# Altium PCB LTC_Test_Board.PcbDoc
Units mil, origin at the board's own origin, x right, y up, seen from the top; angles counter-clockwise.
Board outline 3935 x 3390 mil, 2 copper layers (Top Layer, Bottom Layer), stack 21 mil thick; 76 components, 66 nets, 270 pads, 43 vias.
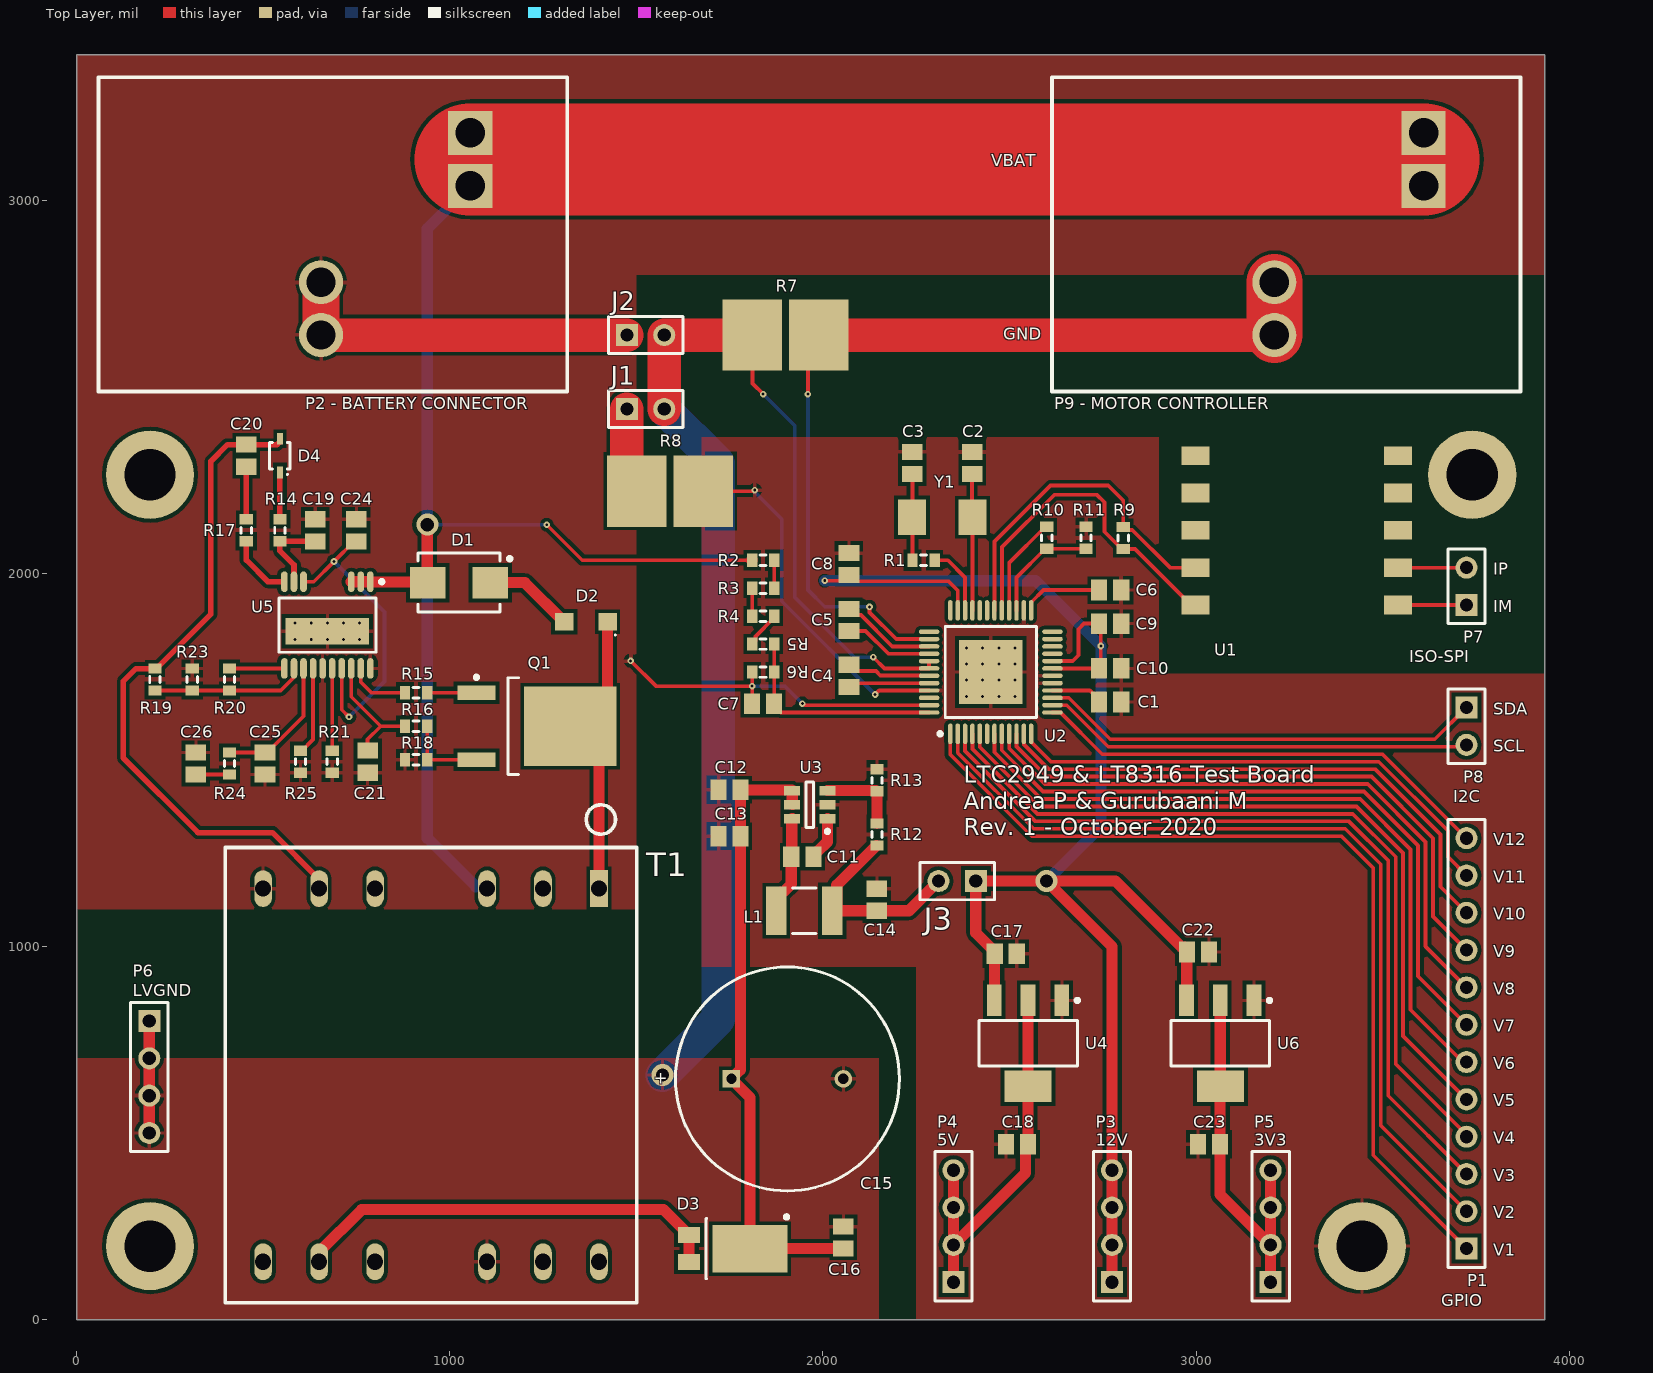
[diagram p0: Top Layer view]
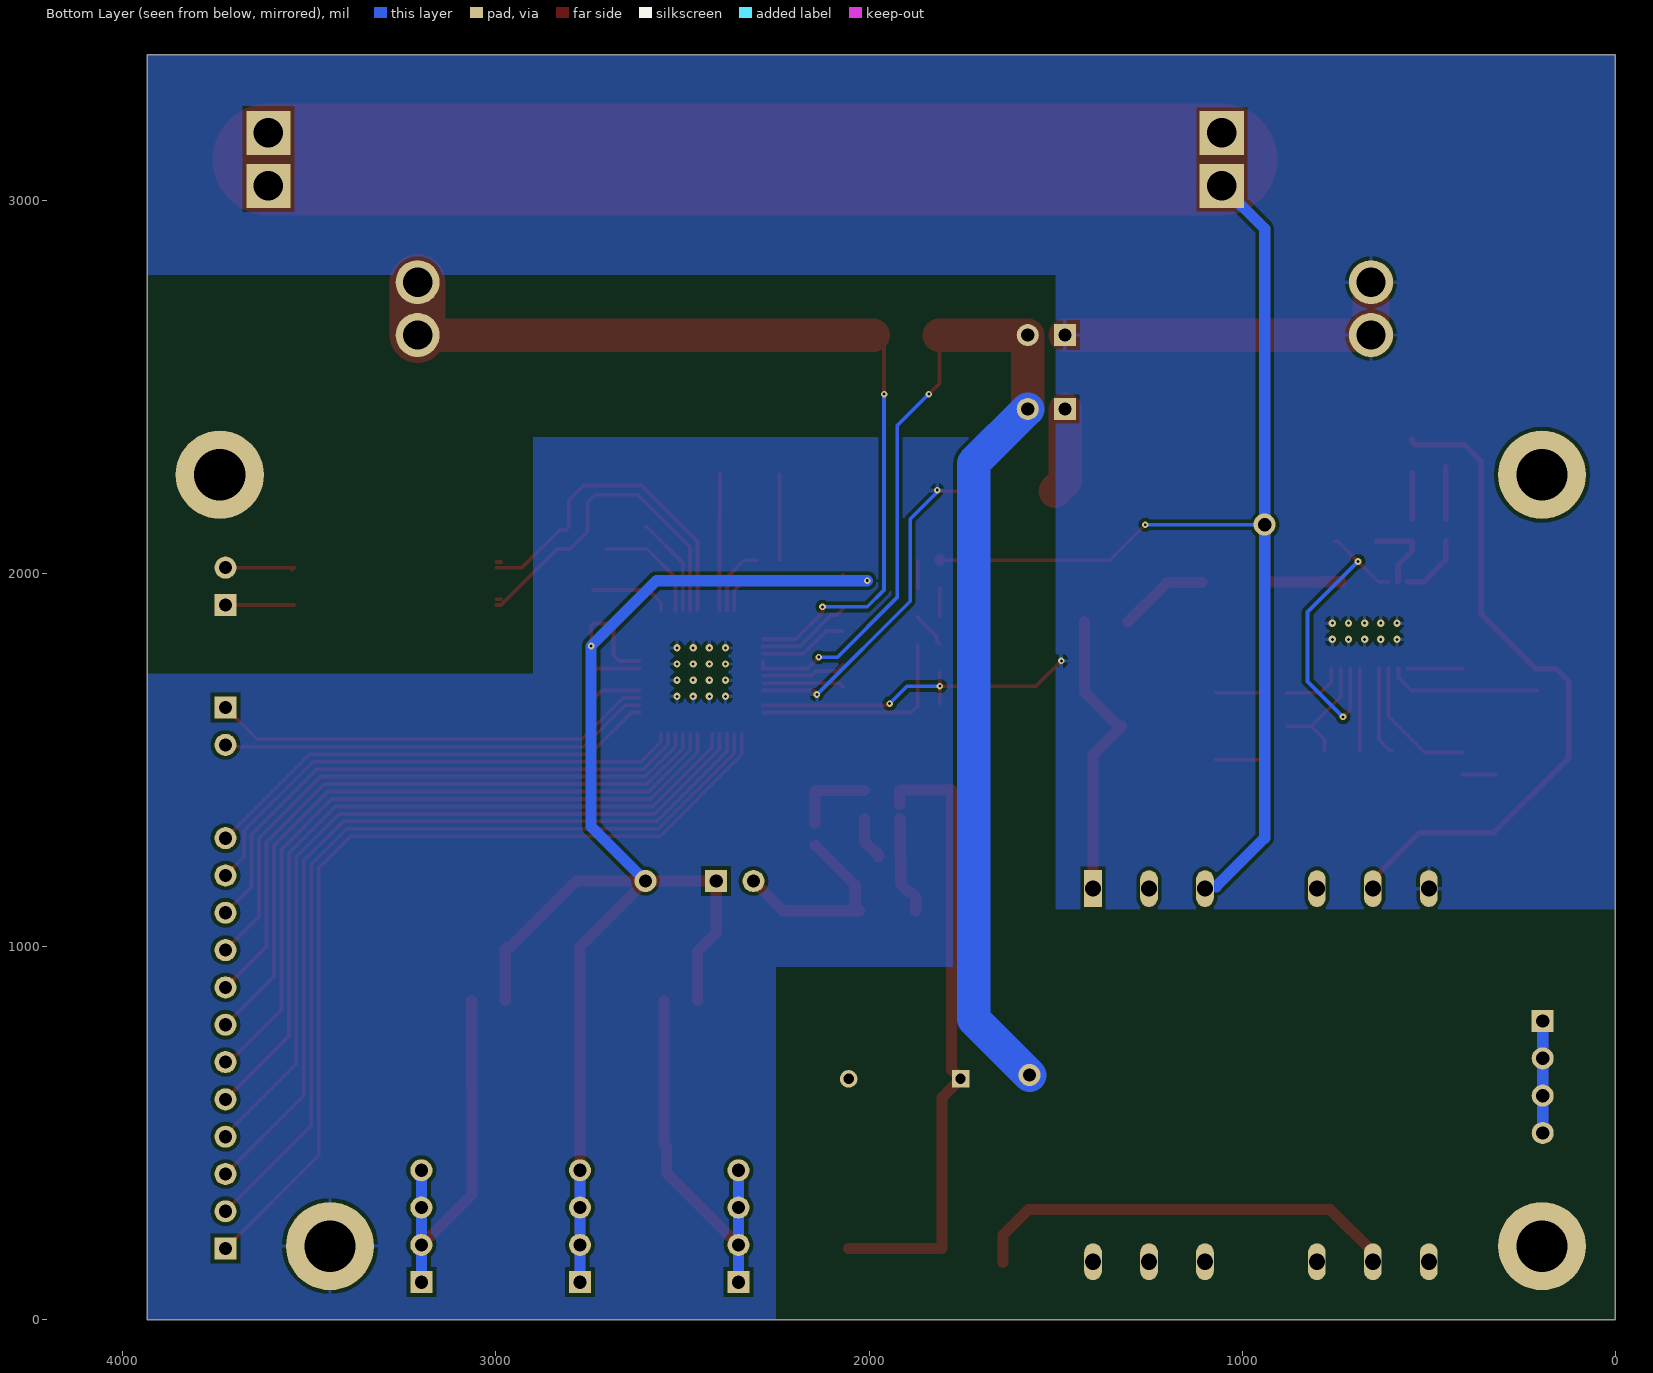
[diagram p1: Bottom Layer view, seen from below]

## Layer stack, top to bottom
Top Solder: solder mask 0.4, Solder Resist, Dk 3.5
Top Layer: signal copper 1.4
Dielectric 2: prepreg 2.8, PP-006, Dk 4.1
Dielectric 1: dielectric 12.6, FR-4, Dk 4.8
Dielectric 3: prepreg 2.8, PP-006, Dk 4.1
Bottom Layer: signal copper 1.4
Bottom Solder: solder mask 0.4, Solder Resist, Dk 3.5

## Board outline
0,0 3935,0 3935,3390 0,3390

## Design rules (kind name [scope] priority, off if disabled: settings)
Clearance [All] p1: gap=10 ignorepadtopadclearanceinfootprint=FALSE except(0: Arc-Hole Track-Hole SMDPad-Hole THPad-Hole Via-Hole Fill-Hole Poly-Hole Region-Hole Text-Hole; 5: Arc-Arc Arc-Track Track-Track SMDPad-SMDPad; 7.87: Arc-SMDPad Track-SMDPad)
HoleSize [All] p1: absolutevalues=TRUE maxlimit=248.03 minlimit=7.87 maxpercent=80.000 minpercent=20.000
HoleToHoleClearance [All] p1: gap=21.26 allowstackedmicrovias=TRUE
MinimumSolderMaskSliver [All] p1: minsoldermaskwidth=7.87
PolygonConnect [All] p1: connectstyle=Relief reliefconductorwidth=10 reliefentries=4 polygonreliefangle="90 Angle" airgapwidth=10
RoutingVias [All] p1: holewidth=7.87 width=17.72 viastyle="Through Hole" minholewidth=7.87 minwidth=17.72 maxholewidth=39.37 maxwidth=59.06
SilkToSilkClearance [All] p1: silktosilkclearance=5.91
SilkToSolderMaskClearance [IsText vs HasFootprint('No Footprint')] p1: minsilkscreentomaskgap=5.91 clearancetoexposedcopper=TRUE
SolderMaskExpansion [All] p1: expansion=3.94 istentingtop=FALSE
Width [All] p1: maxlimit=300 minlimit=10 preferedwidth=10 minimp=50.000000 maximp=50.000000 favimp=50.000000
25 further rules are at their usual default settings.

## Classes and differential pairs
net class V[1..12]: V1 V2 V3 V4 V5 V6 V7 V8 V9 V10 V11 V12
component class "Main IC": C1 C2 C3 C4 C5 C6 C7 C8 C9 C10 J1 R1 R2 R3 R4 R6 R7 R8 R9 R10 R11 U1 U2 Y1
component class Headers: P1 "P2 - BATTERY CONNECTOR" P3 P4 P5 P6 "P6 GND" P7 P8 "P9 - MOTOR CONTROLLER"
component class Designator: C11 C12 C13 C14 C15 C16 C17 C18 C19 C20 C21 C22 C23 C24 C25 C26 D1 D2 D3 D4 "J2 GND" J3 L1 Q1 R12 R13 R14 R15 R16 R17 R18 R19 R20 R21 R23 R24 R25 T1 U3 U4 U5 U6

## Components (designator, comment, footprint, x,y, rotation, side; value= is the part's Value field where it differs from the comment)
C1 "Cap" C0805 2770,1655 r0 top value=1uF
C2 "50V" C0805 2400,2295 r270 top value=4pF
C3 "50V" C0805 2240,2295 r270 top value=4pF
C4 "Cap" C0805 2070,1725 r90 top value=1uF
C5 "Cap" C0805 2070,1875 r90 top value=1uF
C6 "Cap" C0805 2770,1955 r0 top value=1uF
C7 "Cap" C0805 1840,1650 r0 top value=10nF
C8 "Cap" C0805 2070,2025 r90 top value=1uF
C9 "Cap" C0805 2770,1865 r0 top value=1uF
C10 "Cap" C0805 2770,1745 r0 top value=0.1uF
C11 "C_OUT" C0805 1945,1240 r0 top value=0.1uF
C12 "C_OUT" C0805 1750,1420 r0 top value=4.7uF
C13 "C_OUT" C0805 1750,1295 r0 top value=0.1uF
C14 "C_OUT" C0805 2145,1125 r270 top value=10uF
C15 "C_OUT" RB7.6-15 1905,645 r180 top value=100uF
C16 "C_OUT" C0805 2055,220 r270 top value=10uF
C17 "C_OUT" C0805 2490,980 r180 top value=10uF
C18 "C_OUT" C0805 2520,470 r0 top value=10uF
C19 "C_BIAS" C0805 640,2115 r270 top value=4.7uF
C20 "C_DCM" C0805 455,2315 r270 top value=47pF
C21 "C_OUT" C0805 780,1495 r90 top value=1nF
C22 "C_OUT" C0805 3005,985 r180 top value=10uF
C23 "C_OUT" C0805 3035,470 r0 top value=10uF
C24 "C_INTVCC" C0805 750,2115 r90 top value=4.7uF
C25 "C_ADD" C0805 505,1490 r90 top value=470pF
C26 "C_C" C0805 320,1490 r270 top value=220nF
D1 "Z_SNUB" "DO-214AA, SMB" 1025,1975 r0 top
D2 "D_SNUB" SOD-123FL 1365,1870 r180 top
D3 "D_OUT" "POWERDI5 (DPAK184P650X115-3N)" 1757.76,190 r0 top
D4 "D_BIAS" SOD323 545,2315 r270 top
J1 "Header 2" HDR1X2 1475,2440 r0 top
J2 "Header 2" HDR1X2 1475,2638.27 r0 top
J3 "Header 2" HDR1X2 2410,1175 r180 top
L1 "Inductor" INDC4532 1950,1095 r0 top value=33uH
P1 "Header 12" HDR1X12 3725,190 r90 top
"P2 - BATTERY CONNECTOR" "MOLEX-0399100102" PHOENIX-1017531 1055,3180 r270 top (schematic designator P2)
P3 "Header 1x4" HDR1X4 2775,100 r90 top
P4 "Header 1x4" HDR1X4 2350,100 r90 top
P5 "Header 1x4" HDR1X4 3200,100 r90 top
P6 "Header 1x4" HDR1X4 195,800 r270 top
P7 "Header 2" HDR1X2 3725,1915 r90 top
P8 "Header 2" HDR1X2 3725,1640 r270 top
"P9 - MOTOR CONTROLLER" "MOLEX-0399100102" PHOENIX-1017531 3610,3180 r270 top (schematic designator P9)
Q1 "MOSFET-N" "DPAK (228P972X240-3N)" 1235,1590 r0 top
R1 "0603" J1-0603 2270,2035 r180 top value=0
R2 "Res1" J1-0603 1840,2035 r180 top value=10K
R3 "Res1" J1-0603 1840,1960 r0 top value=10K
R4 "Res1" J1-0603 1840,1885 r180 top value=10K
R5 "Res1" J1-0603 1840,1810 r180 top value=10K
R6 "Res1" J1-0603 1840,1735 r0 top value=10K
R7 "Res1" 2818#1 1900,2638.27 r0 top value=100m
R8 "Res1" 2818#2 1590,2220 r0 top value=100m
R9 "1%" J1-0603 2805,2094.53 r90 top value=120
R10 "1%" J1-0603 2600,2095 r90 top value=3K
R11 "1%" J1-0603 2705,2095 r90 top value=1K
R12 "Res1" J1-0603 2145,1300 r90 top value=243k
R13 "Res1" J1-0603 2145,1445 r270 top value=22.1k
R14 "R_ADD" J1-0603 545,2115 r90 top value=10
R15 "R_SNS" J1-0603 910,1680 r0 top value=20
R16 "R_SNS" J1-0603 910,1590 r0 top value=100
R17 "R_DCM" J1-0603 455,2115 r90 top value=10k
R18 "R_SNS" J1-0603 910,1500 r180 top value=50m
R19 "R_FB2" J1-0603 210,1715 r90 top value=44.2k
R20 "R_TC" J1-0603 410,1715 r270 top value=259k
R21 "R_C" J1-0603 685,1495 r90 top value=0
R23 "R_FB1" J1-0603 310,1715 r270 top value=4.99k
R24 "R_C" J1-0603 410,1490 r90 top value=10k
R25 "R_IREG" J1-0603 600,1495 r90 top value=56.2k
T1 "8:2:1" PQ2620 1400,1155 r270 top
U1 "HM2100NLT" HM2100NLT 3270,2115 r90 top
U2 "LTC2949" LTC2949 2450,1735 r90 top
U3 "TPS560430" SOT23-6_N 1965,1380 r180 top
U4 "NCP1117LPST50" NCP1117LPST 2550,740 r270 top
U5 "LT8316-EFE" LTC8315/8316 672.2,1861.14 r270 top
U6 "NCP1117LPST33" NCP1117LPST 3065,740 r270 top
Y1 "CX5032GB" CX5032GB08000H0HPQZ1 2320,2150 r0 top

## Footprints (in the part's own frame and the unit in brackets; to place one, negate y for a bottom-side part, rotate by r counter-clockwise, add the part's x,y. Pads: shape width x height; smd on the part's side, far side on the other; paste and mask are expansions set on the pad)
2818#1 [mm] "Chip Resistor, 2-Leads, Body 7.11x4.57mm, IPC Medium Density"
  rect 4.05x4.85 smd: 1(-2.25,0) 2(2.25,0)
  body extent -3.69,-2.42 3.68,2.41, height 1.76
2818#2 [mm] "Chip Resistor, 2-Leads, Body 7.11x4.57mm, IPC Medium Density"
  rect 4.05x4.85 smd: 1(-2.25,0) 2(2.286,0)
  body extent -3.69,-2.42 3.68,2.41, height 1.76
C0805 [mm] "Chip Capacitor, Body 2.0x1.3mm, IPC High Density"
  rect 1.1x1.4 smd: 1(-0.75,0) 2(0.75,0)
  body extent -1.1,-0.72 1.1,0.72, height 1.4
CX5032GB08000H0HPQZ1 [mm]
  rect 1.9x2.4 smd: 1(-2.05,0) 2(2.05,0)
  body extent -2.5,-1.6 2.5,1.6, height 1.1
"DO-214AA, SMB" [mm] "Molded Diode, 2-Leads, Body 5.40x3.62mm, IPC Medium Density"
  rect 2.4x2.15 smd: 1(-2.125,0) 2(2.125,0)
  silkscreen extent -2.8,-2 3.58,2, body extent -2.8,-1.97 2.8,1.97, height 2.44
"DPAK (228P972X240-3N)" [mm] "D-PAK, 3-Pads, Body 6.20x6.66mm (max), IPC Medium Density"
  rect 2.6x1 smd: 1(-4.15,2.28) 3(-4.15,-2.28)
  rect 6.3x5.4 smd: 2(2.25,0)
  silkscreen extent -4.27,-3.3 -1.3,3.45, body extent -2,-3.3 4.2,3.3, height 2.4
HDR1X2 [mm] "Connector; Header; 2 Position"
  rect 1.5x1.5 hole 0.9: 1(0,0)
  round 1.5 hole 0.9: 2(2.54,0)
  silkscreen extent -1.27,-1.27 3.81,1.27
HDR1X4 [mm] "Connector; Header; 4 Position"
  rect 1.5x1.5 hole 0.9: 1(0,0)
  round 1.5 hole 0.9: 2(2.54,0) 3(5.08,0) 4(7.62,0)
  silkscreen extent -1.27,-1.27 8.89,1.27
HDR1X12 [mm] "Connector; Header; 12 Position"
  rect 1.5x1.5 hole 0.9: 1(0,0)
  round 1.5 hole 0.9: 2(2.54,0) 3(5.08,0) 4(7.62,0) 5(10.16,0) 6(12.7,0) 7(15.24,0) 8(17.78,0) 9(20.32,0) 10(22.86,0) 11(25.4,0) 12(27.94,0)
  silkscreen extent -1.27,-1.27 29.21,1.27
HM2100NLT [mm]
  rect 1.27x1.89 smd: 1(-5.08,-6.895) 2(-2.54,-6.895) 3(0,-6.895) 4(2.54,-6.895) 5(5.08,-6.895) 6(5.08,6.895) 7(2.54,6.895) 8(0,6.895) 9(-2.54,6.895) 10(-5.08,6.895)
  body extent -7.37,-5.84 7.37,5.84, height 3.45
INDC4532 [mm] "Chip Inductor, Body 4.5x3.2mm, IPC High Density"
  rect 1.4x3.3 smd: 1(-1.9,0) 2(1.9,0)
  silkscreen extent -0.8,-1.55 0.8,1.55, body extent -2.4,-1.7 2.4,1.7, height 0.55
J1-0603 [mm] "Chip Resistor, Body 1.6x0.8mm, IPC High Density"
  rect 0.7x0.9 smd: 1(-0.75,0) 2(0.75,0)
  silkscreen extent -0.2,-0.35 0.2,0.35, body extent -0.85,-0.48 0.85,0.48, height 0.9
LTC2949 [mm] "LQFP, 48-Leads, IPC Medium Density"
  oval 1.4x0.3 smd: 1(-4.2,2.75) 2(-4.2,2.25) 3(-4.2,1.75) 4(-4.2,1.25) 5(-4.2,0.75) 6(-4.2,0.25) 7(-4.2,-0.25) 8(-4.2,-0.75) 9(-4.2,-1.25) 10(-4.2,-1.75) 11(-4.2,-2.25) 12(-4.2,-2.75) 25(4.2,-2.75) 26(4.2,-2.25) 27(4.2,-1.75) 28(4.2,-1.25) 29(4.2,-0.75) 30(4.2,-0.25) 31(4.2,0.25) 32(4.2,0.75) 33(4.2,1.25) 34(4.2,1.75) 35(4.2,2.25) 36(4.2,2.75)
  oval 0.3x1.4 smd: 13(-2.75,-4.2) 14(-2.25,-4.2) 15(-1.75,-4.2) 16(-1.25,-4.2) 17(-0.75,-4.2) 18(-0.25,-4.2) 19(0.25,-4.2) 20(0.75,-4.2) 21(1.25,-4.2) 22(1.75,-4.2) 23(2.25,-4.2) 24(2.75,-4.2) 37(2.75,4.2) 38(2.25,4.2) 39(1.75,4.2) 40(1.25,4.2) 41(0.75,4.2) 42(0.25,4.2) 43(-0.25,4.2) 44(-0.75,4.2) 45(-1.25,4.2) 46(-1.75,4.2) 47(-2.25,4.2) 48(-2.75,4.2)
  rect 4.35x4.35 smd: 49(0,0)
  silkscreen extent -4.32,-3.1 3.1,3.57, body extent -3.5,-3.5 3.5,3.5, height 1.6
LTC8315/8316 [mm] "TSOP, 20-Leads, Body 6.50x4.40mm, Pitch 0.65mm, Thermal Pad 5.68x1.78mm, IPC Medium Density"
  oval 1.4x0.45 smd: 1(-2.95,2.925) 2(-2.95,2.275) 3(-2.95,1.625) 8(-2.95,-1.625) 9(-2.95,-2.275) 10(-2.95,-2.925) 11(2.95,-2.925) 12(2.95,-2.275) 13(2.95,-1.625) 14(2.95,-0.975) 15(2.95,-0.325) 16(2.95,0.325) 17(2.95,0.975) 18(2.95,1.625) 19(2.95,2.275) 20(2.95,2.925)
  rect 1.78x5.68 smd: PAD(0.42,0)
  silkscreen extent -3.07,-3.3 1.85,3.83, body extent -2.25,-3.3 2.25,3.3, height 1.2
NCP1117LPST [mm] "SOT223, 4-Leads, Body 6.50x7.00mm (avg), Pitch 2.30mm, IPC Medium Density"
  rect 2.15x1 smd: 1(-2.925,2.3) 2(-2.925,0) 3(-2.925,-2.3)
  rect 2.15x3.2 smd: 2(2.925,0)
  silkscreen extent -3.05,-3.35 1.55,3.48, body extent -1.85,-3.35 1.85,3.35, height 1.8
PHOENIX-1017531 [mm]
  rect 3x3 hole 2: 1(0,0) 1(3.6,0)
  round 3 hole 2: 1(3.6,0) 2(10.16,-10.16) 2(13.76,-10.16)
  silkscreen extent -3.79,-25.3 17.6,6.6
"POWERDI5 (DPAK184P650X115-3N)" [mm] "TO, 3-Pads, Body 5.83x5.39mm (max), IPC Medium Density"
  rect 1.5x1.1 smd: 1(-2.95,-0.92) 1(-2.95,0.92)
  rect 5.1x3.25 smd: 2(1.2,0)
  silkscreen extent -1.8,-2.05 3.81,2.28, body extent -2.65,-2.02 2.8,2.02, height 1.15
PQ2620 [mm] "SUMIDA 11328-T080"
  rect 2.5x1.2 hole 1.1: 1(0,0)
  oval 2.5x1.2 hole 1.1: 2(0,-3.81) 3(0,-7.62) 4(0,-15.24) 5(0,-19.05) 6(0,-22.86) 7(25.4,-22.86) 8(25.4,-19.05) 9(25.4,-15.24) 10(25.4,-7.62) 11(25.4,-3.81) 12(25.4,0)
  silkscreen extent -5.7,-25.43 28.2,2.57
RB7.6-15 [mm] "Polarized Capacitor (Radial); 2 Leads"
  rect 1.2x1.2 hole 0.7: 1(3.81,0)
  round 1.2 hole 0.7: 2(-3.81,0)
  silkscreen extent -7.62,-7.62 7.62,7.62
SOD323 [mm] "SODFL, 2-Leads, Body 1.30x2.50mm, IPC Medium Density"
  rect 0.8x0.4 smd: 1(-1.15,0) 2(1.15,0)
  silkscreen extent -0.9,-0.7 1.32,0.7, body extent -0.9,-0.7 0.9,0.7, height 1.2
SOD-123FL [mm] "SOD-123FL, IPC Medium Density"
  rect 1.25x1.2 smd: 1(-1.475,0) 2(1.475,0)
  silkscreen extent -2.05,0.85 -1.95,0.95, body extent -1.45,-0.95 1.45,0.95, height 1.43
SOT23-6_N [mm] "SOT23, 6-Leads, Body 2.9x1.6mm, Pitch 0.95mm, Lead Span 2.7mm, IPC Medium Density"
  rect 1.1x0.65 smd: 1(-1.2,0.95) 2(-1.2,0) 3(-1.2,-0.95) 4(1.2,-0.95) 5(1.2,0) 6(1.2,0.95)
  silkscreen extent -1.33,-1.55 0.25,1.95, body extent -0.9,-1.55 0.9,1.55, height 1.45

## Part data
C1 C4 C5 C6 C7 C8 C9 C10: "Capacitor", LatestRevisionDate=17-Jul-2002, LatestRevisionNote="Re-released for DXP Platform.", PackageDescription="Radial Cap, Thru-Hole; 2 Leads; 0.3 in Pin Spacing", PackageReference=RAD-0.3, Published=8-Jun-2000, Publisher="Altium Limited"
C2: library part Cap, "CBR08C409B5GAC. 4pF ±0.1pF 50V Ceramic Capacitor C0G, NP0 0805 (2012 Metric)", LatestRevisionDate=17-Jul-2002, LatestRevisionNote="Re-released for DXP Platform.", PackageDescription="Radial Cap, Thru-Hole; 2 Leads; 0.3 in Pin Spacing", PackageReference=RAD-0.3, Published=8-Jun-2000, Publisher="Altium Limited"
C3: library part Cap, "CBR08C409B5GAC", LatestRevisionDate=17-Jul-2002, LatestRevisionNote="Re-released for DXP Platform.", PackageDescription="Radial Cap, Thru-Hole; 2 Leads; 0.3 in Pin Spacing", PackageReference=RAD-0.3, Published=8-Jun-2000, Publisher="Altium Limited"
C11 C12 C13 C14 C17 C18 C19 C20 C21 C22 C23 C24 C25 C26: library part Cap, "Capacitor", LatestRevisionDate=17-Jul-2002, LatestRevisionNote="Re-released for DXP Platform.", PackageDescription="Radial Cap, Thru-Hole; 2 Leads; 0.3 in Pin Spacing", PackageReference=RAD-0.3, Published=8-Jun-2000, Publisher="Altium Limited"
C15: library part "Cap Pol1", "Polarized Capacitor (Radial)", Voltage=35V, LatestRevisionDate=17-Jul-2002, LatestRevisionNote="Re-released for DXP Platform.", PackageDescription="Polarized Capacitor (Radial); 2 Leads", PackageReference=RB7.6-15, Published=8-Jun-2000, Publisher="Altium Limited"
C16: library part Cap, "Capacitor", Voltage=50V, LatestRevisionDate=17-Jul-2002, LatestRevisionNote="Re-released for DXP Platform.", PackageDescription="Radial Cap, Thru-Hole; 2 Leads; 0.3 in Pin Spacing", PackageReference=RAD-0.3, Published=8-Jun-2000, Publisher="Altium Limited"
D1: library part "D Zener", "Zener Diode", PartNumber=SMBJ188A, Reverse Voltage=328V@2A
D2: library part Diode, "Default Diode", PartNumber=US1MFA, Reverse Voltage=1000V
D3: library part "D Schottky", "Schottky Diode", Forward Voltage=0.84V@2A, PartNumber=PDS4200HQ-13
D4: library part Diode, "Default Diode", PartNumber=BAV20WS-7-F, Reverse Voltage=200V
J1 J2 J3 P7 P8: "Header, 2-Pin", LatestRevisionDate=17-Jul-2002, LatestRevisionNote="Re-released for DXP Platform.", Publisher="Altium Limited"
P1: "Header, 12-Pin", LatestRevisionDate=17-Jul-2002, LatestRevisionNote="Re-released for DXP Platform.", Publisher="Altium Limited"
"P2 - BATTERY CONNECTOR" "P9 - MOTOR CONTROLLER": "TERM BLK 2P SIDE ENT 10.16MM PCB"
P3 P4 P5 P6: library part "Header 4", "Header, 4-Pin", LatestRevisionDate=17-Jul-2002, LatestRevisionNote="Re-released for DXP Platform.", Publisher="Altium Limited"
Q1: "N-Channel MOSFET", Part Number=STD6N90K5, LatestRevisionDate=17-Jul-2002, LatestRevisionNote="Re-released for DXP Platform.", PackageDescription="TO, Flat Index; 3 In-Line, Axial Leads; Body Dia. 4.6mm; Lead Dia. 0.5 mm (max)", PackageReference=E3, PackageVersion=1995/1996, Published=8-Jun-2000, Publisher="Altium Limited"
R1: library part Res1, "ERJ-U030R00V. 0 Ohms Jumper 0.1W, 1/10W Chip Resistor 0603 (1608 Metric) Anti-Sulfur, Automotive AEC-Q200 Thick Film", LatestRevisionDate=17-Jul-2002, LatestRevisionNote="Re-released for DXP Platform.", PackageDescription="Axial Device, Thru-Hole; 2 Leads; 0.3 in Pin Spacing", PackageReference=AXIAL-0.3, Published=8-Jun-2000, Publisher="Altium Limited"
R2 R3 R4 R5 R6 R12 R13: "Resistor", LatestRevisionDate=17-Jul-2002, LatestRevisionNote="Re-released for DXP Platform.", PackageDescription="Axial Device, Thru-Hole; 2 Leads; 0.3 in Pin Spacing", PackageReference=AXIAL-0.3, Published=8-Jun-2000, Publisher="Altium Limited"
R7 R8: "Resistor", Part Number=WSHM2818R1000FEA, LatestRevisionDate=17-Jul-2002, LatestRevisionNote="Re-released for DXP Platform.", PackageDescription="Axial Device, Thru-Hole; 2 Leads; 0.3 in Pin Spacing", PackageReference=AXIAL-0.3, Published=8-Jun-2000, Publisher="Altium Limited"
R9 R10 R11: library part Res1, "Resistor", LatestRevisionDate=17-Jul-2002, LatestRevisionNote="Re-released for DXP Platform.", PackageDescription="Axial Device, Thru-Hole; 2 Leads; 0.3 in Pin Spacing", PackageReference=AXIAL-0.3, Published=8-Jun-2000, Publisher="Altium Limited"
R14 R15 R16 R17 R18 R19 R20 R21 R23 R24 R25: library part Res2, "Resistor", LatestRevisionDate=17-Jul-2002, LatestRevisionNote="Re-released for DXP Platform.", PackageDescription="Axial Device, Thru-Hole; 2 Leads; 0.4 in Pin Spacing", PackageReference=AXIAL-0.4, Published=8-Jun-2000, Publisher="Altium Limited"
T1: library part Trans3, "Three-winding Transformer (Non-Ideal)", Part Number="SUMIDA 11328-T080", Primary Inductance=670uH, Secondary Inductance=42uH, LatestRevisionDate=17-Jul-2002, LatestRevisionNote="Re-released for DXP Platform.", Published=25-Jan-2001, Tertiary Inducatance=10.5uH
U3: "IC REG BUCK PFM 600MA SOT23-6"
U4: "IC REG LINEAR 5V 1A SOT223"
U5: "600VIN MICROPOWER, ISOLATED NO-O"
U6: "IC REG LINEAR 3.3V 1A SOT223"
Y1: library part XTAL, "8MHz ±20ppm Crystal 12pF 300 Ohms 2-SMD, No Lead", LatestRevisionDate=17-Jul-2002, LatestRevisionNote="Re-released for DXP Platform.", PackageDescription="Crystal, Thru-Hole; 2 Leads; Body 3.1 x 8.2 mm (Dia.xH)", PackageReference=R38, Published=8-Jun-2000, Publisher="Altium Limited"
L1: Code_IEC=1005, Code_JEITA=0402, LatestRevisionDate=29-May-2009, LatestRevisionNote="IPC-7351 Footprint Added.", PackageDescription="Chip Inductor", PackageReference=0402-A, Published=8-Jun-2000, Publisher="Altium Limited"

## Free pads (board coordinates)
  round 236.22 hole 137.8: 1(196.85,196.85) 1(196.85,2263.78) 1(3444.88,196.85) 1(3740.16,2263.78)

## Via types
v1: diameter 19.68, hole 7.87, Top Layer to Bottom Layer, 26 vias
v2: diameter 17.72, hole 7.87, Top Layer to Bottom Layer, 14 vias
v3: diameter 59.06, hole 35.43, Top Layer to Bottom Layer, 3 vias

## Nets (pads, with @x,y where several pads share a name; then routed paths per layer and width w, separated by ;. In a path a pad name is that pad's centre, name@x,y a point inside that pad or via, vN(x,y) a via of type N, cw(c..) or ccw(c..) an arc to the next point about the centre after c; other vN are vias at no path point)
3.3V: C23.2 P5.1 P5.2 P5.3 P5.4 U6.2 | length 1311.5
  Top Layer w30: U6.2@3065,855.16 3065,624.84 3064.53,624.37 C23.2 3064.53,335.47 P5.2 ; P5.1 P5.2 ; P5.4 P5.3 P5.2
  Bottom Layer w30: P5.1 P5.2 P5.3 P5.4
5V: C18.2 P4.1 P4.2 P4.3 P4.4 U4.2 | length 1338
  Top Layer w30: P4.1 P4.2 ; P4.4 P4.3 P4.2 ; U4.2@2550,855.16 2550,624.84 2549.53,624.37 C18.2 2542.87,463.35 2542.87,392.87 P4.2
  Bottom Layer w30: P4.1 P4.2 P4.3 P4.4
12V: C8.1 C9.1 C10.1 C17.2 C22.2 J3.1 P3.1 P3.2 P3.3 P3.4 U2.19 U2.20 U2.35 U4.3 U6.3 | length 4960.1
  Top Layer w10: v2(2005,1980) 2052.16,1980 2053.35,1978.82 C8.1 2086.65,1978.82 2336.18,1978.82 2361.42,1953.58 U2.35 ; U2.19 2740.31,1744.84 C10.1 2745,1749.53 v2(2745,1805) 2745,1860.47 C9.1 2700,1865 2685,1850 2685,1780 2669.53,1764.53 U2.20
  Top Layer w30: U4.3 2459.96,855.67 2459.96,986.42 2410,1036.38 J3.1 2410.19,1175.19 2599.24,1175.19 v3(2599.53,1175.47) ; P3.1 P3.2 P3.3 P3.4 2775,1000 v3(2599.53,1175.47) ; U6.3 2974.96,855.67 2974.96,991.42 2968.82,997.56 2961.89,997.56 2783.98,1175.47 v3(2599.53,1175.47)
  Bottom Layer w30: v2(2005,1980) 2570,1980 v2(2745,1805) 2745,1320.94 v3(2599.53,1175.47) ; P3.1 P3.2 P3.3 P3.4
12V-OUT: C14.2 J3.2 L1.2 R12.1 | length 526.7
  Top Layer w30: L1.2 2025.28,1095.47 C14.2 2230.47,1095.47 J3.2 ; L1.2@2037.36,1107.56 2037.36,1164.33 2143.5,1270.47 R12.1
24V: C12.2 C13.2 C15.1 C16.2 D3.2 U3.4 U3.5 | length 1687.8
  Top Layer w30: U3.5 U3.4 1916.46,1418.7 1780.83,1418.7 C12.2 C13.2 1779.53,669.53 C15.1 1805,595 D3.2 1805.47,190.47 C16.2
BGND: "P2 - BATTERY CONNECTOR.2" C7.1 C19.1 C21.1 C24.2 C25.1 C26.1 J2.1 R6.1 R18.2 R21.1 R23.1 R25.1 T1.6 U2.47 U5.15 U5.20 U5.PAD | length 1895.5
  Top Layer w10: v2(1485,1765) 1552.58,1697.42 v2(1810.4,1697.42) ; C7.1 1810.47,1697.42 R6.1 ; v2(1945,1650.59) 1947.09,1650.59 1951.26,1646.42 U2.47
  Top Layer w90: 655,2638.27 J2.1
  Top Layer w100: 655,2638.27 655,2780
  Bottom Layer w10: v2(1810.4,1697.42) 1898.17,1697.42 v2(1945,1650.59)
  other v1: 585.59,1822.95 628.9,1822.95 672.2,1822.95 715.51,1822.95 758.82,1822.95 585.59,1866.26 628.9,1866.26 672.2,1866.26 715.51,1866.26 758.82,1866.26
CLKI: C2.2 U2.33 Y1.2 | length 365.4
  Top Layer w10: C2.2 2400,2150.71 Y1.2 2400.79,2149.92 U2.33
CLKO: R1.1 U2.34 | length 189.2
  Top Layer w10: R1.1 2335,2035 2381.1,1988.9 U2.34
DRAIN: D2.1 Q1.2 T1.1 | length 792.7
  Top Layer w30: T1.1 1400,1513.58 Q1.2 1331.77,1590 1423.07,1681.3 D2.1
GND: C15.2 C16.1 J1.2 J2.2 P6.1 P6.2 P6.3 P6.4 R7.1 T1.10 U2.41 U2.42 | length 4150.3
  Top Layer w10: R7.1 1811.42,2508.58 v2(1840,2480) ; v2(2135,1775) 2165.16,1744.84 U2.42 U2.41
  Top Layer w30: P6.4 P6.3 P6.2 P6.1
  Top Layer w90: J1.2 J2.2 R7.1
  Bottom Layer w10: v2(1840,2480) 1925,2395 1925,1935 2085,1775 v2(2135,1775)
  Bottom Layer w30: P6.4 P6.3 P6.2 P6.1
  Bottom Layer w90: v3(1570,655) 1720,805 1720,2295 J1.2
GND-LC: C1.2 C2.1 C3.1 C6.2 C8.2 C9.2 C10.2 C12.1 C13.1 C14.1 C17.1 C18.1 C22.1 C23.1 pad.1@3444.88,196.85 R8.2 R11.2 R13.1 U2.17 U2.18 U2.26 U2.45 U2.49 U3.2 U4.1 U6.1 | length 968.7
  Top Layer w10: R8.2 1815,2220 v2(1817.5,2222.5) ; v2(2140,1675) 2150.79,1685.79 U2.45
  Bottom Layer w10: v2(1817.5,2222.5) 1817.5,2217.5 1890,2145 1890,1925 v2(2140,1675)
  other v1: 2385.04,1670.04 2428.35,1670.04 2471.65,1670.04 2514.96,1670.04 2385.04,1713.35 2428.35,1713.35 2471.65,1713.35 2514.96,1713.35 2385.04,1756.65 2428.35,1756.65 2471.65,1756.65 2514.96,1756.65 2385.04,1799.96 2428.35,1799.96 2471.65,1799.96 2514.96,1799.96
IM: R9.2 U1.9 U2.30 | length 930.3
  Top Layer w10: U2.30 2460,1900.51 2460,2085 2610,2235 2765,2235 2805,2195 R9.2 2813.38,2115.67 2829.33,2115.67 2930,2015 U1.9 ; U1.9@2986.34,2030 U1.9@2998.54,2030
INTVCC/EN: C24.1 U5.8 U5.17 | length 836.3
  Top Layer w10: U5.8 635.91,1977.28 v2(690,2031.38) 744.09,2085.47 C24.1 ; U5.17 710.59,1634.41 v2(730,1615)
  Bottom Layer w10: v2(690,2031.38) 825,1896.38 825,1710 v2(730,1615)
IP: R9.1 U1.10 U2.29 | length 927
  Top Layer w10: U2.29 2479.87,1900.7 2479.87,1923.63 2480,1923.76 2480,2070 2620,2210 2735,2210 2755,2190 2755,2111.06 2801.06,2065 R9.1 2836.34,2065 2986.34,1915 U1.10 ; U1.10@2986.34,1930 U1.10@2998.54,1930
NetC1_1: C1.1 U2.16 | length 141.5
  Top Layer w10: U2.16@2614.88,1685.79 U2.16@2615.01,1685.66 ; U2.16 2715.59,1685.79 2740.47,1660.91 C1.1
NetC3_2: C3.2 R1.2 Y1.1 | length 230.7
  Top Layer w10: C3.2 2240,2150.71 2240.47,2150.24 R1.2
NetC4_1: C4.1 U2.44 | length 218.8
  Top Layer w10: C4.1 2080,1705.47 U2.44
NetC4_2: C4.2 U2.43 | length 226.8
  Top Layer w10: C4.2 2086.65,1737.87 2142.13,1737.87 2153.94,1726.06 2260.81,1726.06 2261.37,1725.5 2284.3,1725.5 U2.43
NetC5_1: C5.1 U2.40 | length 240
  Top Layer w10: C5.1 2114.53,1845.47 2175.79,1784.21 U2.40
NetC5_2: C5.2 U2.39 | length 256.3
  Top Layer w10: C5.2 2086.65,1887.87 2102.13,1887.87 2186.1,1803.9 U2.39
NetC6_1: C6.1 U2.25 | length 217.5
  Top Layer w10: U2.25 2558.27,1922.01 2591.26,1955 C6.1
NetC7_2: C7.2 R5.1 R6.2 U2.48 | length 588.2
  Top Layer w10: R5.1 R6.2 C7.2 1869.53,1644.09 1886.89,1626.73 U2.48
NetC11_1: C11.1 L1.1 U3.6 | length 268.3
  Top Layer w30: L1.1 1875.2,1132.4 1887.76,1144.96 1892.99,1144.96 1915.47,1167.44 C11.1 1916.61,1241.14 1916.61,1341.46 U3.6
NetC11_2: C11.2 U3.1 | length 120.1
  Top Layer w30: C11.2 1974.53,1245.91 1981.18,1252.56 1984.41,1252.56 2012.24,1280.39 U3.1
NetC19_2: C19.2 R14.1 U5.9 | length 218.8
  Top Layer w15: U5.9 582.64,2022.36 545,2060 R14.1 C19.2
NetC20_2: C20.2 R17.2 | length 140.9
  Top Layer w15: R17.2 C20.2
NetC21_2: C21.2 R16.1 U5.18 | length 333.1
  Top Layer w10: U5.18 736.18,1668.82 815,1590 ; C21.2 780,1555 815,1590 ; R16.1 815,1590
NetC25_2: C25.2 R24.2 U5.13 | length 366.7
  Top Layer w10: R24.2 C25.2 510.91,1519.53 608.23,1616.85 U5.13
NetC26_2: C26.2 R24.1 | length 90
  Top Layer w10: C26.2 R24.1
NetD1_2: D1.2 D2.2 | length 241.8
  Top Layer w30: D1.2 1200.95,1975 1305.95,1870 D2.2
NetD3_1: D3.1 T1.8 | length 1165.5
  Top Layer w30: T1.8 650,180.59 764.41,295 1572.83,295 1641.61,226.22 D3.1@1641.61,153.78
NetD4_2: D4.2 R14.2 | length 125.2
  Top Layer w15: R14.2 D4.2
NetJ1_1: J1.1 R8.1 | length 230.9
  Top Layer w90: J1.1 1475,2246.42 R8.1
NetP7_1: P7.1 U1.1 | length 183.5
  Top Layer w10: U1.1 P7.1
NetP7_2: P7.2 U1.2 | length 190.6
  Top Layer w10: U1.2@3546.46,2010 U1.2 P7.2
NetP8_1: P8.1 U2.15 | length 1190.9
  Top Layer w10: U2.15 2658.9,1666.1 2770,1555 3640,1555 P8.1
NetP8_2: P8.2 U2.14 | length 1157.9
  Top Layer w10: U2.14 2653.58,1646.42 2765,1535 3720,1535 P8.2
NetP9_2: "P9 - MOTOR CONTROLLER.2" R7.2 U2.38 | length 2446.1
  Top Layer w10: v2(1960,2480) 1960,2609.69 R7.2 ; v2(2125,1910) 2125,1895 2196.42,1823.58 U2.38
  Top Layer w90: R7.2 3210,2638.27
  Top Layer w150: 3210,2638.27 3210,2780
  Bottom Layer w10: v2(1960,2480) 1960,1955 2005,1910 v2(2125,1910)
NetQ1_1: Q1.1 R15.2 | length 132.2
  Top Layer w10: R15.2 1071.38,1680 Q1.1
NetQ1_3: Q1.3 R16.2 R18.1 | length 222.2
  Top Layer w10: R16.2 R18.1 1071.38,1500 Q1.3
NetR2_1: R2.1 R3.2 | length 75
  Top Layer w10: R3.2 R2.1
NetR3_1: R3.1 R4.2 | length 75
  Top Layer w10: R4.2 R3.1
NetR4_1: R4.1 R5.2 | length 99.5
  Top Layer w10: R5.2 1819.25,1818.78 1819.25,1830.79 1869.53,1881.06 R4.1
NetR10_1: R10.1 R11.1 U2.27 | length 306
  Top Layer w10: U2.27 2518.9,1988.31 2596.06,2065.47 R10.1 R11.1
NetR10_2: R10.2 U2.28 | length 268.2
  Top Layer w10: U2.28 2499.21,2027.68 2596.06,2124.53 R10.2
NetR12_2: R12.2 R13.2 U3.3 | length 219.5
  Top Layer w30: U3.3 2141.57,1417.4 2143.5,1415.47 R13.2 R12.2
NetR15_1: R15.1 U5.19 | length 167.2
  Top Layer w10: U5.19 761.77,1708.23 790,1680 R15.1
NetR17_1: R17.1 U5.10 | length 176.4
  Top Layer w15: R17.1 455,2035 512.72,1977.28 U5.10
NetR19_1: R19.1 R20.2 R23.2 U5.12 | length 411.3
  Top Layer w10: R19.1 R23.2 R20.2 546.95,1685.47 581.16,1719.68 581.16,1743.52 U5.12
NetR20_1: R20.1 U5.11 | length 147.2
  Top Layer w10: R20.1 556.58,1744.53 U5.11
NetR25_2: R25.2 U5.14 | length 236.8
  Top Layer w10: R25.2 603.94,1524.53 633.82,1554.41 U5.14
SMODE: R21.2 U5.16 | length 220.5
  Top Layer w10: R21.2 U5.16
TERT_WIND: C20.1 D4.1 R19.2 T1.5 | length 1848.7
  Top Layer w15: D4.1 545,2352.4 537.13,2344.53 C20.1 404.53,2344.53 360,2300 360,1890.59 213.94,1744.53 159.53,1744.53 125,1710 125,1505.59 325.59,1305 525,1305 650,1180 T1.5 ; T1.5@645,1115 T1.5@645,1140.59
V1: P1.1 U2.1 | length 2438.8
  Top Layer w10: U2.1 2341.73,1513.27 2560,1295 3390,1295 3475,1210 3475,440 P1.1
V2: P1.2 U2.2 | length 2333.6
  Top Layer w10: U2.2 2361.42,1518.58 2565,1315 3400,1315 3495,1220 3495,520 P1.2
V3: P1.3 U2.3 | length 2228.4
  Top Layer w10: U2.3 2381.1,1523.9 2570,1335 3410,1335 3515,1230 3515,600 P1.3
V4: P1.4 U2.4 | length 2123.1
  Top Layer w10: U2.4 2400.79,1529.21 2575,1355 3420,1355 3535,1240 3535,685 3725,495 P1.4
V5: P1.5 U2.5 | length 2017.9
  Top Layer w10: U2.5 2420.47,1534.53 2580,1375 3430,1375 3555,1250 3555,760 P1.5
V6: P1.6 U2.7 | length 1910.4
  Top Layer w10: U2.7 2459.84,1520.16 2585,1395 3440,1395 3575,1260 3575,830 3715,690 P1.6
V7: P1.7 U2.8 | length 1799.3
  Top Layer w10: U2.8 2479.53,1525.47 2590,1415 3450,1415 3595,1270 3595,920 P1.7
V8: P1.8 U2.9 | length 1694.1
  Top Layer w10: U2.9 2499.21,1530.79 2595,1435 3460,1435 3615,1280 3615,1000 P1.8
V9: P1.9 U2.10 | length 1588.9
  Top Layer w10: U2.10 2519.24,1569.3 2519.24,1535.76 2600,1455 3470,1455 3635,1290 3635,1080 P1.9
V10: P1.10 U2.11 | length 1483.8
  Top Layer w10: U2.11 2538.93,1569.3 2538.93,1540.77 2604.7,1475 3480,1475 3655,1300 3655,1160 P1.10
V11: P1.11 U2.12 | length 1377.7
  Top Layer w10: U2.12 2558.27,1547.99 2611.26,1495 3490,1495 3675,1310 3675,1240 P1.11
V12: P1.12 U2.13 | length 1249.1
  Top Layer w10: U2.13 2637.01,1626.73 2748.74,1515 3500,1515 P1.12
VBAT: "P2 - BATTERY CONNECTOR.1" "P9 - MOTOR CONTROLLER.1" D1.1 R2.2 T1.3 U5.1 U5.2 U5.3 | length 5805.5
  Top Layer w10: v2(1260,2130) 1355,2035 R2.2@1809.25,2035 ; R2.2@1810,2036.42 R2.2@1811.42,2035
  Top Layer w30: U5.3 U5.2 U5.1 788.5,1976.14 940.2,1976.14 940,1976.34 v3(940,2130) ; R2.2@1809.25,2035 1810,2035.75 R2.2@1810,2036.42
  Top Layer w300: 1055,3109.13 3610,3109.13
  Bottom Layer w10: v3(940,2130) v2(1260,2130)
  Bottom Layer w30: 1055,3038.27 940,2923.27 v3(940,2130) 940,1290 1070,1160
pads on no net: T1.2 T1.4 T1.7 T1.9 T1.11 T1.12 U1.3 U1.4 U1.5 U1.6 U1.7 U1.8 U2.6 U2.21 U2.22 U2.23 U2.24 U2.31 U2.32 U2.36 U2.37 U2.46

## Polygon pours and split planes (outlines as drawn)
BGND on Top Layer "BGND_L01_P014" (solid, remove dead copper, pour order 14): 0,1100 1500,1100 1500,2800 3935,2800 3935,3390 0,3390
GND-LC on Top Layer "GND-LC_L01_P007" (solid, pour order 7): 1675,945 2250,945 2250,0 3935,0 3935,2335 3965,2365 1675,2365
GND on Top Layer "GND_L01_P008" (solid, pour order 8): 0,0 0,700 2150,700 2150,0
BGND on Bottom Layer "BGND_L02_P010" (solid, pour order 10): 0,3390 0,1100 1500,1100 1500,2800 3935,2800 3935,3390
GND-LC on Bottom Layer "GND-LC_L02_P013" (solid, pour order 13): 1675,945 2250,945 2250,0 3935,0 3935,2335 3935,2365 1675,2365

## Other copper
Top Layer:
  pour cut-out: 3935,2490 3935,1730 2900,1730 2900,2490
  pour cut-out: 3935,2490 3935,1730 2900,1730 2900,2490
  pour cut-out: 4124.06,3145.79
  pour cut-out: 3680,3250
Bottom Layer:
  pour cut-out: 3935,2490 3935,1730 2900,1730 2900,2490
  pour cut-out: 3540.94,3250.87 3679.06,3250.87 3679.06,2969.21 3540.94,2969.21

## Silkscreen, mask and mechanical layers (free items; w line width, h text height)
Top Overlay:
  text "VBAT" at 2451.7,3091 h32
  text "GND" at 2483.69,2626 h32
  text "IP" at 3796,1996 h32
  text "IM" at 3796,1896 h32
  text "ISO-SPI" at 3571.73,1761 h32
  text "SDA" at 3796,1621 h32
  text "SCL" at 3796,1521 h32
  text "LTC2949 & LT8316 Test Board" at 2378,1438 h45
  text "I2C" at 3689.03,1386 h32
  text "Andrea P & Gurubaani M" at 2378,1368 h45
  text "Rev. 1 - October 2020" at 2378,1298 h45
  text "V12" at 3796,1271 h32
  text "V11" at 3796,1171 h32
  text "V10" at 3796,1071 h32
  text "V9" at 3796,971 h32
  text "V8" at 3796,871 h32
  text "LVGND" at 151,866 h32
  text "V7" at 3796,771 h32
  text "V6" at 3796,671 h32
  text "V5" at 3796,571 h32
  text "V4" at 3796,471 h32
  text "5V" at 2306,466 h32
  text "12V" at 2731,466 h32
  text "3V3" at 3156,466 h32
  text "V3" at 3796,371 h32
  text "V2" at 3796,271 h32
  text "V1" at 3796,171 h32
  text "GPIO" at 3657.04,36 h32

## Text inside footprints (layer, text, board x,y; h text height)
C15: Top Overlay "+" at 1585,660 h32 r180